# Altium PCB NEW_PCB_2025-05-28.pcbdoc
Units mm, origin at the board's own origin, x right, y up, seen from the top; angles counter-clockwise.
Board outline 36.3 x 36.31 mm, 2 copper layers (Top Layer, Bottom Layer); 1 components, 0 nets, 11 pads, 0 vias.
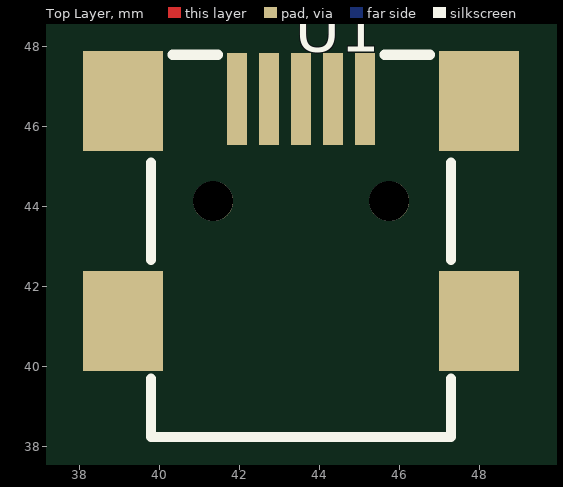
[diagram p0: Top Layer view]
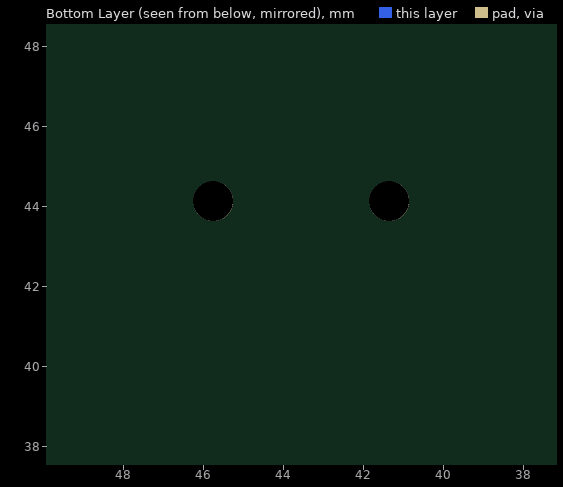
[diagram p1: Bottom Layer view, seen from below]

## Layer stack, top to bottom
Top Layer: signal copper (thickness not stored)
Dielectric: dielectric 0.32, FR-4, Dk 4.8
Bottom Layer: signal copper (thickness not stored)

## Board outline
61.7,25.4 25.4,25.4 25.4,61.708 61.7,61.708

## Components (designator, comment, footprint, x,y, rotation, side; value= is the part's Value field where it differs from the comment)
U1 "MINI-USB-SMD_KH-MINI-SMT-5P-CU" MINI-USB-SMD_KH-MINI-SMT-5P-CU 43.55,43.902 r0 top

## Footprints (in the part's own frame and the unit in brackets; to place one, negate y for a bottom-side part, rotate by r counter-clockwise, add the part's x,y. Pads: shape width x height; smd on the part's side, far side on the other; paste and mask are expansions set on the pad)
MINI-USB-SMD_KH-MINI-SMT-5P-CU [mm]
  rect 0.5x2.3 smd paste+0 mask+0.05: 1(-1.6,2.775) 2(-0.8,2.775) 3(0,2.775) 4(0.8,2.775) 5(1.6,2.775)
  rect 2x2.5 smd paste+0 mask+0.05: 6(-4.45,-2.775) 7(-4.45,2.725) 8(4.45,-2.775) 9(4.45,2.725)
  round 1 hole 1 unplated paste+0: ""(-2.2,0.225) ""(2.2,0.225)
  silkscreen extent -3.75,-5.67 3.75,3.89

## Nets (pads, with @x,y where several pads share a name; then routed paths per layer and width w, separated by ;. In a path a pad name is that pad's centre, name@x,y a point inside that pad or via, vN(x,y) a via of type N, cw(c..) or ccw(c..) an arc to the next point about the centre after c; other vN are vias at no path point)
pads on no net: U1. U1.1 U1.2 U1.3 U1.4 U1.5 U1.6 U1.7 U1.8 U1.9